# EAGLE board CAPS-WIMA (EAGLE 4.09)

Size 160 x 100 mm. Coordinates in mm from the lower left corner, seen from the top.
Outline: 0,0 160,0 160,100 0,100 0,0
Copper layers used: 

## Footprints (pad centres in the part's own frame; a part is rotated, then mirrored left to right if it is on the bottom)
C27.5B13 = drill 1.194 pad 3.15 octagon: 1 -13.716,0; 2 13.716,0
C27.5B15 = drill 1.194 pad 3.15 octagon: 1 -13.716,0; 2 13.716,0
C27.5B17 = drill 1.194 pad 3.15 octagon: 1 -13.716,0; 2 13.716,0
C27.5B20 = drill 1.194 pad 3.15 octagon: 1 -13.716,0; 2 13.716,0
C37.5B15 = drill 1.321 pad 3.15 octagon: 1 -18.796,0; 2 18.796,0
C37.5B19 = drill 1.321 pad 3.15 octagon: 1 -18.796,0; 2 18.796,0
C37.5B20 = drill 1.321 pad 3.15 octagon: 1 -18.796,0; 2 18.796,0
C2.5-2 = drill 0.813 pad 1.6 octagon: 1 -1.27,0; 2 1.27,0
C2.5-3 = drill 0.813 pad 1.6 octagon: 1 -1.27,0; 2 1.27,0
C2.5-4 = drill 0.813 pad 1.6 octagon: 1 -1.27,0; 2 1.27,0
C2.5-5 = drill 0.813 pad 1.6 octagon: 1 -1.27,0; 2 1.27,0
C2.5-6 = drill 0.813 pad 1.6 octagon: 1 -1.27,0; 2 1.27,0
C5B2.5 = drill 0.813 pad 1.6 octagon: 1 -2.54,0; 2 2.54,0
C5B3 = drill 0.813 pad 1.6 octagon: 1 -2.54,0; 2 2.54,0
C5B3.5 = drill 0.813 pad 1.6 octagon: 1 -2.54,0; 2 2.54,0
C5B4.5 = drill 0.813 pad 1.6 octagon: 1 -2.54,0; 2 2.54,0
C5B5 = drill 0.813 pad 1.6 octagon: 1 -2.54,0; 2 2.54,0
C5B5.5 = drill 0.813 pad 1.6 octagon: 1 -2.54,0; 2 2.54,0
C5B7.2 = drill 0.813 pad 1.6 octagon: 1 -2.54,0; 2 2.54,0
C7.5B3 = drill 0.914 pad 1.905 octagon: 1 -3.81,0; 2 3.81,0
C7.5B4 = drill 0.914 pad 1.905 octagon: 1 -3.81,0; 2 3.81,0
C7.5B5 = drill 0.914 pad 1.905 octagon: 1 -3.81,0; 2 3.81,0
C7.5B6 = drill 0.914 pad 1.905 octagon: 1 -3.81,0; 2 3.81,0
C10B4 = drill 1.016 pad 2.159 octagon: 1 -5.08,0; 2 5.08,0
C10B5 = drill 1.016 pad 2.159 octagon: 1 -5.08,0; 2 5.08,0
C10B6 = drill 1.016 pad 2.159 octagon: 1 -5.08,0; 2 5.08,0
C15B5 = drill 1.016 pad 2.159 octagon: 1 -7.493,0; 2 7.493,0
C15B6 = drill 1.016 pad 2.159 octagon: 1 -7.493,0; 2 7.493,0
C15B7 = drill 1.016 pad 2.159 octagon: 1 -7.493,0; 2 7.493,0
C15B8 = drill 1.016 pad 2.159 octagon: 1 -7.493,0; 2 7.493,0
C15B9 = drill 1.016 pad 2.159 octagon: 1 -7.493,0; 2 7.493,0
C22.5B6 = drill 1.016 pad 2.54 octagon: 1 -11.303,0; 2 11.303,0
C22.5B7 = drill 1.016 pad 2.54 octagon: 1 -11.303,0; 2 11.303,0
C22.5B8 = drill 1.016 pad 2.54 octagon: 1 -11.303,0; 2 11.303,0
C22.5B10 = drill 1.016 pad 2.54 octagon: 1 -11.303,0; 2 11.303,0
C22.5B11 = drill 1.016 pad 2.54 octagon: 1 -11.303,0; 2 11.303,0
C27.5B9 = drill 1.194 pad 3.15 octagon: 1 -13.716,0; 2 13.716,0
C27.5B11 = drill 1.194 pad 3.15 octagon: 1 -13.716,0; 2 13.716,0

## Placement (x,y rotation side)
E$1  C27.5B13  [C27.5B13]  18.41,62.7 180 top
E$2  C27.5B15  [C27.5B15]  56.51,62.7 180 top
E$3  C27.5B17  [C27.5B17]  93.34,62.7 180 top
E$4  C27.5B20  [C27.5B20]  131.44,62.7 180 top
E$5  C37.5B15  [C37.5B15]  24.76,86.83 180 top
E$6  C37.5B19  [C37.5B19]  73.02,86.83 180 top
E$7  C37.5B20  [C37.5B20]  125.09,86.83 180 top
E$18  C2.5-2  [C2.5-2]  10.79,6.82 180 top
E$19  C2.5-3  [C2.5-3]  22.22,6.82 180 top
E$20  C2.5-4  [C2.5-4]  32.38,6.82 180 top
E$21  C2.5-5  [C2.5-5]  42.54,6.82 180 top
E$22  C2.5-6  [C2.5-6]  52.7,6.82 180 top
E$23  C5B2.5  [C5B2.5]  65.4,6.82 180 top
E$24  C5B3  [C5B3]  76.83,6.82 180 top
E$25  C5B3.5  [C5B3.5]  89.53,6.82 180 top
E$26  C5B4.5  [C5B4.5]  103.5,6.82 180 top
E$27  C5B5  [C5B5]  116.2,6.82 180 top
E$28  C5B5.5  [C5B5.5]  130.17,6.82 180 top
E$29  C5B7.2  [C5B7.2]  144.14,6.82 180 top
E$30  C7.5B3  [C7.5B3]  9.52,18.25 180 top
E$31  C7.5B4  [C7.5B4]  26.03,18.25 180 top
E$32  C7.5B5  [C7.5B5]  42.54,18.25 180 top
E$33  C7.5B6  [C7.5B6]  57.78,18.25 180 top
E$34  C10B4  [C10B4]  74.29,18.25 180 top
E$35  C10B5  [C10B5]  92.07,18.25 180 top
E$36  C10B6  [C10B6]  109.85,18.25 180 top
E$37  C15B5  [C15B5]  127.63,18.25 180 top
E$38  C15B6  [C15B6]  147.95,18.25 180 top
E$39  C15B7  [C15B7]  13.33,29.68 180 top
E$40  C15B8  [C15B8]  36.19,29.68 180 top
E$41  C15B9  [C15B9]  59.05,29.68 180 top
E$42  C22.5B6  [C22.5B6]  84.45,29.68 180 top
E$43  C22.5B7  [C22.5B7]  116.2,29.68 180 top
E$44  C22.5B8  [C22.5B8]  144.14,29.68 180 top
E$45  C22.5B10  [C22.5B10]  22.22,42.38 180 top
E$46  C22.5B11  [C22.5B11]  53.97,42.38 180 top
E$47  C27.5B9  [C27.5B9]  85.72,42.38 180 top
E$48  C27.5B11  [C27.5B11]  120.01,42.38 180 top

## Library data of the parts
E$1-E$7 E$18-E$48 = capacitor-wima